# Altium PCB PCB1.PcbDoc
Units mm, origin at the board's own origin, x right, y up, seen from the top; angles counter-clockwise.
Board outline 80 x 50 mm, 2 copper layers (Top Layer, Bottom Layer); 88 components, 64 nets, 316 pads, 58 vias.
Unrouted connection lines stored in the file: 1.
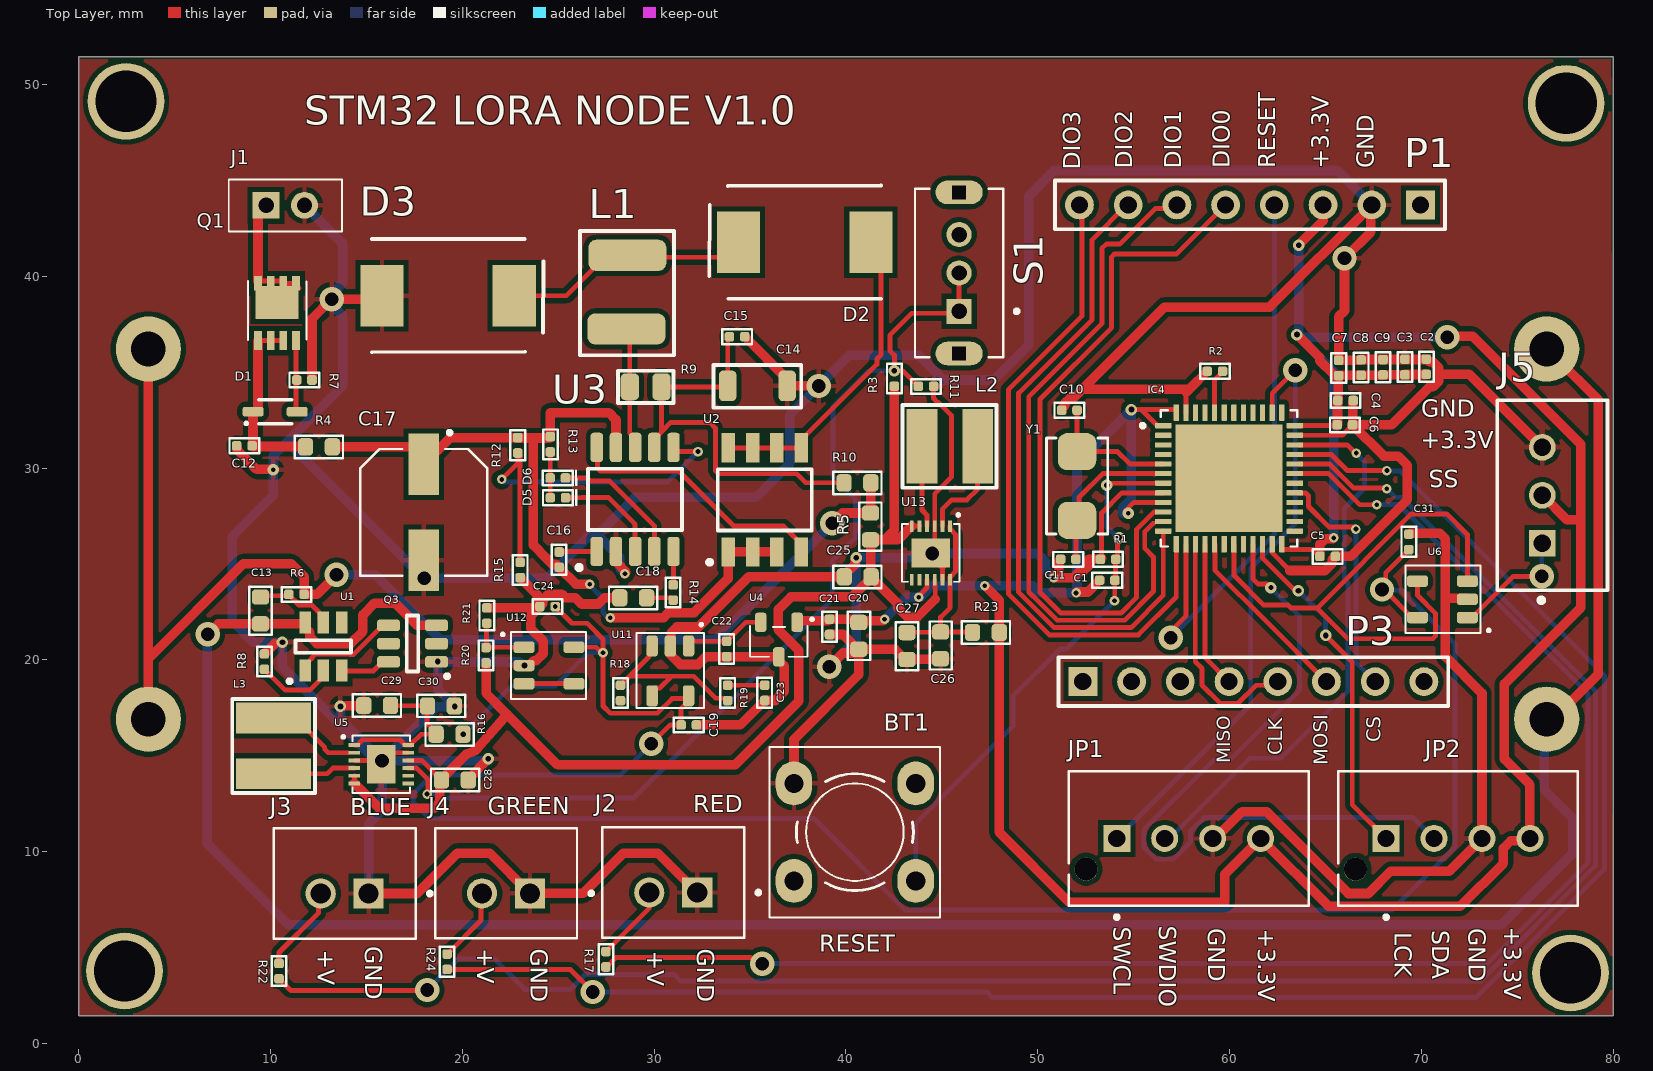
[diagram p0: Top Layer view]
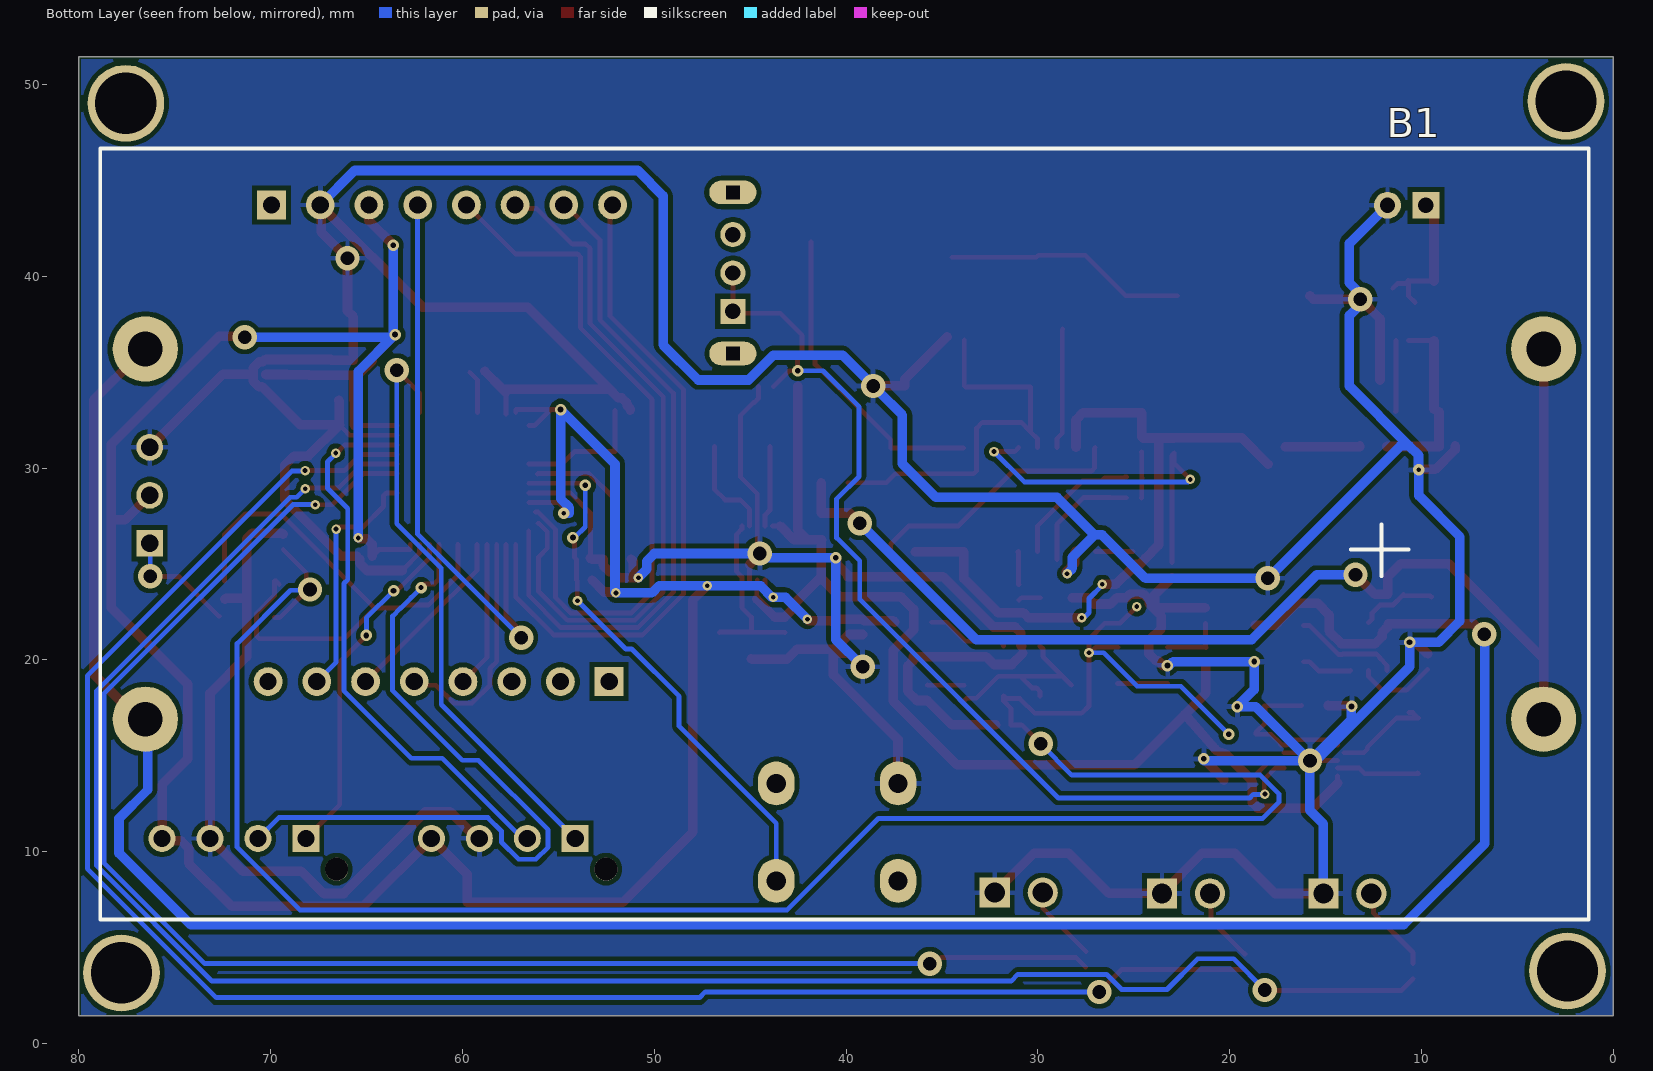
[diagram p1: Bottom Layer view, seen from below]
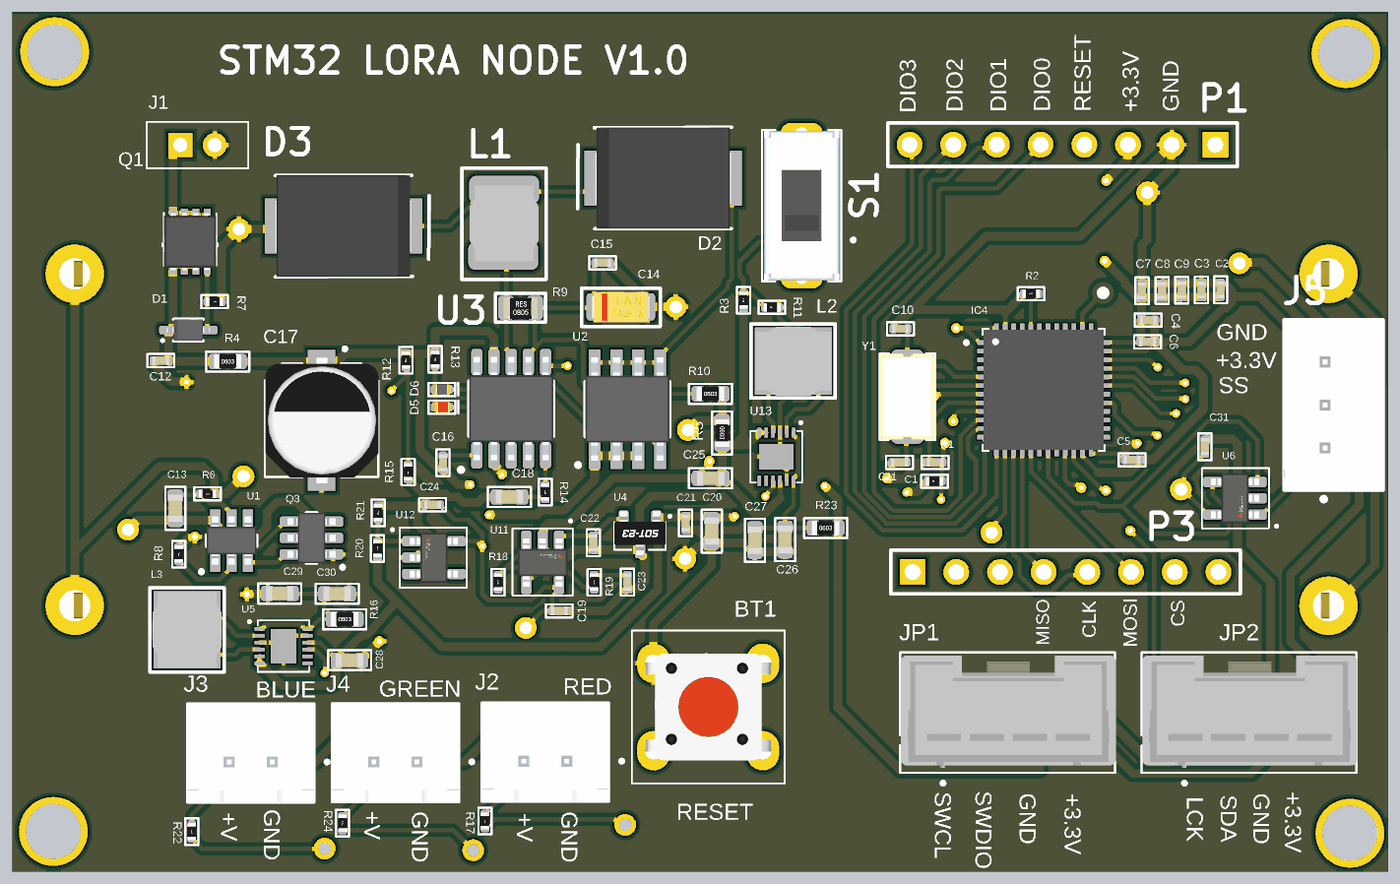
[diagram p2: 3D render of the assembled board from above, using the file's embedded part models]

## Layer stack, top to bottom
Top Solder: solder mask 0.0102, Solder Resist, Dk 3.5
Top Layer: signal copper 0.0356
Dielectric 1: dielectric 0.32, FR-4, Dk 4.8
Bottom Layer: signal copper 0.0356
Bottom Solder: solder mask 0.0102, Solder Resist, Dk 3.5

## Board outline
0,1.448 80,1.448 80,51.448 0,51.448

## Design rules (kind name [scope] priority, off if disabled: settings)
Clearance [All] p1: gap=0.254 ignorepadtopadclearanceinfootprint=FALSE except(0: Arc-Hole Track-Hole SMDPad-Hole THPad-Hole Via-Hole Fill-Hole Poly-Hole Region-Hole Text-Hole; 0.127: Arc-Arc Arc-Track Track-Track; 0.15: Arc-SMDPad Arc-Via Track-SMDPad Track-Via SMDPad-SMDPad SMDPad-Via)
HoleSize [All] p1: absolutevalues=TRUE maxlimit=4 minlimit=0.025 maxpercent=80.000 minpercent=20.000
MinimumSolderMaskSliver [All] p1: minsoldermaskwidth=0.01
PolygonConnect [All] p1: connectstyle=Relief reliefconductorwidth=0.254 reliefentries=4 polygonreliefangle="90 Angle" airgapwidth=0.254
RoutingVias [All] p1: holewidth=0.711 width=1.27 viastyle="Through Hole" minholewidth=0.711 minwidth=1.27 maxholewidth=0.711 maxwidth=1.27
SilkToSolderMaskClearance [IsPad] p1: minsilkscreentomaskgap=0.01 clearancetoexposedcopper=TRUE
SolderMaskExpansion [All] p1: expansion=0.102 istentingtop=FALSE
Width [All] p1: maxlimit=2 minlimit=0.254 preferedwidth=0.254 minimp=50.000000 maximp=50.000000 favimp=50.000000
27 further rules are at their usual default settings.

## Classes and differential pairs
component class POWER_NODE: B1 C12 C13 C14 C15 C16 C17 C18 C19 C20 C21 C22 C23 C24 C25 C26 C27 C28 C29 C30 C31 D1 D2 D3 D5 D6 J1 J5 J6 L1 L2 L3 Q1 Q3 R3 R4 R5 R6 R7 R8 R9 R10 R11 R12 R13 R14 R15 R16 R18 R19 R20 R21 R23 R54 S1 U1 U2 U3 U4 U5 U6 U11 U12 U13
component class "- MCU_NODE": BT1 C1 C2 C3 C4 C5 C6 C7 C8 C9 C10 C11 IC4 J2 J3 J4 JP1 JP2 P1 P3 R1 R2 R17 R22 R24 Y1

## Components (designator, comment, footprint, x,y, rotation, side; value= is the part's Value field where it differs from the comment)
B1 "18650 2cell" "18650 2CELL" 40.283,26.435 r0 bottom
BT1 "Nut Nhan 2 Chan SMD 3x6x2.5" "BUTTON 4P" 40.437,10.947 r0 top
C1 "0.1uF" "CAP 0402 (1005)" 53.664,25.248 r180 top
C2 "0.1uF" "CAP 0402 (1005)" 70.256,35.287 r90 top
C3 "0.1uF" "CAP 0402 (1005)" 69.139,35.274 r90 top
C4 "4.7uF" "CAP 0402 (1005)" 66.04,33.528 r0 top
C5 "0.1uF" "CAP 0402 (1005)" 65.107,25.4 r0 top
C6 "0.1uF" "CAP 0402 (1005)" 66.008,32.258 r0 top
C7 "0.1uF" "CAP 0402 (1005)" 65.684,35.223 r90 top
C8 "0.1uF" "CAP 0402 (1005)" 66.853,35.242 r90 top
C9 "0.1uF" "CAP 0402 (1005)" 67.996,35.261 r90 top
C10 "10pF" "CAP 0402 (1005)" 51.645,33.02 r0 top
C11 "10pF" "CAP 0402 (1005)" 51.587,25.248 r0 top
C12 "0.1uF" "CAP 0402 (1005)" 8.636,31.166 r180 top
C13 "10uF" "CAP 0603 (1608)" 9.474,22.581 r270 top
C14 "10uF" "CAP 1206 TANTALUM" 35.408,34.265 r0 top
C15 "4.7uF" "CAP 0402 (1005)" 34.322,36.855 r0 top
C16 "0.1uF" "CAP 0402 (1005)" 25.044,25.229 r270 top
C17 "47uF" "CAP ALUMIUM 47uF" 18.288,27.686 r270 top
C18 "10uF" "CAP 0603 (1608)" 28.905,23.241 r180 top
C19 "0.1uF" "CAP 0402 (1005)" 31.801,16.612 r0 top
C20 "10uF" "CAP 0603 (1608)" 40.665,21.26 r270 top
C21 "0.1uF" "CAP 0402 (1005)" 39.141,21.729 r270 top
C22 "1uF" "CAP 0402 (1005)" 33.782,20.574 r270 top
C23 "2.2uF" "CAP 0402 (1005)" 35.763,18.288 r270 top
C24 "0.1uF" "CAP 0402 (1005)" 24.441,22.784 r180 top
C25 "10uF" "CAP 0603 (1608)" 40.607,24.333 r180 top
C26 "10uF" "CAP 0603 (1608)" 44.933,20.763 r270 top
C27 "10uF" "CAP 0603 (1608)" 43.18,20.726 r270 top
C28 "10uF" "CAP 0603 (1608)" 19.609,13.741 r0 top
C29 "10uF" "CAP 0603 (1608)" 15.556,17.628 r180 top
C30 "10uF" "CAP 0603 (1608)" 18.883,17.602 r0 top
C31 "0.1uF" "CAP 0402 (1005)" 69.342,26.156 r90 top
D1 "10V" SOT-323 10.236,32.944 r0 top
D2 "SS34" DIOM8059X256N 37.846,41.783 r0 top
D3 "SS34" DIOM8059X256N 19.258,38.989 r180 top
D5 "RED" "LED 0402 RED" 25.019,28.448 r180 top
D6 "BLUE" "LED0402 BLUE" 25.013,29.48 r180 top
IC4 "STM32L082" QFN50P700X700X60-49N 59.969,29.464 r0 top
J1 "CONN" "HEADER 2P 2.54MM ANGLE RIGHT" 10.77,43.637 r0 top
J2 "B2B-XH-A(LF)(SN)" JST_B2B-XH-A(LF)(SN) 30.993,8.399 r0 top
J3 "B2B-XH-A(LF)(SN)" JST_B2B-XH-A(LF)(SN) 13.863,8.348 r0 top
J4 "B2B-XH-A(LF)(SN)" JST_B2B-XH-A(LF)(SN) 22.276,8.357 r0 top
J5 "B3B-XH-A(LF)(SN)" FP-B3B-XH-A_LF_SN-MFG 76.827,28.586 r90 top
JP1 "JP 1x4 2.54" "CONN 4P 2.5mm" 57.867,10.617 r180 top
JP2 "JP 1x4 2.54" "CONN 4P 2.5mm" 71.907,10.617 r180 top
L1 "10uH" "IND 10uH 4x4x2mm" 26.67,41.859 r270 top
L2 "2.2uH" "IND 4028" 45.413,31.039 r0 top
L3 "2.2uH" "IND 4028" 10.262,15.519 r90 top
P1 "Header 8" HDR1X8 69.951,43.722 r180 top
P3 "Header 8" HDR1X8 52.349,18.872 r0 top
Q1 "SIS413DN-T1-GE3" SIS862DNT1GE3 10.338,38.202 r90 top
Q3 "FS8205" SOT95P280X125-6N 17.399,20.853 r180 top
R1 "10kR" "RES 0402 (1005)" 53.619,24.155 r0 top
R2 "10kR" "RES 0402 (1005)" 59.233,35.052 r0 top
R3 "6.8kR" "RES 0402 (1005)" 42.52,34.677 r270 top
R4 "0R" "RES 0603 (1608)" 12.522,31.115 r0 top
R5 "0R" "RES 0603 (1608)" 41.275,26.96 r270 top
R6 "100R" "RES 0402 (1005)" 11.347,23.419 r180 top
R7 "100kR" "RES 0402 (1005)" 11.76,34.595 r180 top
R8 "2kR" "RES 0402 (1005)" 9.677,19.914 r270 top
R9 "50mR" "RES 0805 (2012)" 29.553,34.214 r0 top
R10 "0R" "RES 0603 (1608)" 40.596,29.239 r0 top
R11 "10kR" "RES 0402 (1005)" 44.171,34.265 r180 top
R12 "30kR" "RES 0402 (1005)" 22.885,31.191 r90 top
R13 "1kR" "RES 0402 (1005)" 24.587,31.242 r90 top
R14 "120R" "RES 0402 (1005)" 30.988,23.52 r90 top
R15 "10kR" "RES 0402 (1005)" 23.012,24.689 r90 top
R16 "0R" "RES 0603 (1608)" 19.329,16.129 r0 top
R17 "300R" "RES 0402 (1005)" 27.483,4.394 r90 top
R18 "0R" "RES 0402 (1005)" 28.245,18.282 r270 top
R19 "0.56R" "RES 0402 (1005)" 33.833,18.282 r270 top
R20 "10kR" "RES 0402 (1005)" 21.234,20.244 r270 top
R21 "10kR" "RES 0402 (1005)" 21.273,22.314 r270 top
R22 "180R" "RES 0402 (1005)" 10.439,3.778 r90 top
R23 "0R" "RES 0603 (1608)" 47.295,21.438 r0 top
R24 "180R" "RES 0402 (1005)" 19.202,4.267 r90 top
S1 "SW-SPST" SW_SS12D07VG4 45.898,40.176 r90 top
U1 "HY2112" SOT95P280X140-6N 12.751,20.701 r90 top
U2 "FDS4435BZ" SOIC127P600X175-8N 35.763,28.346 r90 top
U3 "CN3791" SOP100P600X175-10N 29.007,28.372 r90 top
U4 "ISL21010CFH330Z-TK" SOT-23-3 36.5,21.065 r180 top
U5 "ISL9110IRT7Z-T7A" "12-WFDFN EXPOSED PAD" 15.77,14.564 r0 top
U6 "LM321LVIDBVR" SOT-23-5 71.069,23.114 r180 top
U11 "LM321LVIDBVR" SOT-23-5 30.886,19.406 r270 top
U12 "LM321LVIDBVR" SOT-23-5 24.54,19.756 r0 top
U13 "ISL9110IRTNZ-T7A" "12-WFDFN EXPOSED PAD" 44.425,25.578 r270 top
Y1 "8Mhz" SMD5032 52.045,29.07 r90 top

## Footprints (in the part's own frame and the unit in brackets; to place one, negate y for a bottom-side part, rotate by r counter-clockwise, add the part's x,y. Pads: shape width x height; smd on the part's side, far side on the other; paste and mask are expansions set on the pad)
"12-WFDFN EXPOSED PAD" [mm]
  rect 0.6x0.2 smd: 1(-1.4,1) 2(-1.4,0.6) 3(-1.4,0.2) 4(-1.4,-0.2) 5(-1.4,-0.6) 6(-1.4,-1) 7(1.4,-1) 8(1.4,-0.6) 9(1.4,-0.2) 10(1.4,0.2) 11(1.4,0.6) 12(1.4,1)
  rect 1.5x2 smd: 13(0,0)
  silkscreen extent -2.03,-1.5 1.5,1.5, body extent -1.5,-1.5 1.5,1.5, height 0.75
"18650 2CELL" [mm]
  round 3.4 hole 1.8: 1(-36.653,9.523) 2(-36.653,-9.777) 3(36.247,9.523) 4(36.247,-9.777)
  silkscreen extent -39,-20.23 38.6,19.97, body extent -39.05,-20.23 38.65,19.97, height 21.55
"BUTTON 4P" [mil]
  oval 75x90 hole 39.37: 1(-124,103) 2(126,-97) 3(126,103) 4(-124,-97)
  silkscreen extent -174,-172 176,178, body extent -154,-119 157,125, height 78
"CAP 0402 (1005)" [mm]
  rrect50% 0.5x0.5 smd mask+0.05: 1(-0.4,0) 2(0.4,0)
  silkscreen extent -0.77,-0.39 0.78,0.38, body extent -0.5,-0.25 0.5,0.25, height 0.51
"CAP 0603 (1608)" [mm]
  rrect50% 0.8x0.9 smd mask+0.05: 1(-0.7,0) 2(0.7,0)
  silkscreen extent -1.24,-0.58 1.26,0.59, body extent -0.8,-0.4 0.8,0.4, height 0.81
"CAP 1206 TANTALUM" [mm]
  rrect50% 0.9x1.6 smd: 1(-1.575,0.025) 2(1.525,0.025)
  silkscreen extent -2.31,-1.12 2.26,1.12, body extent -1.73,-0.89 1.67,0.91, height 1.8
"CAP ALUMIUM 47uF" [mm]
  rect 3.2x1.6 smd: 1(-2.514,-0.302) 2(2.486,-0.302)
  silkscreen extent -4.26,-3.6 3.29,3, body extent -3.65,-3.58 3.65,3.02, height 7.7
"CONN 4P 2.5mm" [mm]
  rect 1.408x1.408 hole 0.9: 1(3.75,-0.076)
  round 1.408 hole 0.9: 2(1.25,-0.076) 3(-1.25,-0.076) 4(-3.75,-0.076)
  round 1.2 hole 1.2 unplated: ""(5.35,1.524)
  silkscreen extent -6.25,-3.58 6.25,4.12, body extent -6.3,-3.4 6.2,3.13, height 8.51
DIOM8059X256N [mm]
  rect 2.25x3.2 smd: 1(-3.45,0) 2(3.45,0)
  silkscreen extent -4.98,-2.95 3.98,2.95, body extent -3.98,-2.95 3.98,2.95, height 2.56
FP-B3B-XH-A_LF_SN-MFG [mm]
  rect 1.4x1.4 hole 0.9 paste-1000 mask+0: 1(-2.5,0.525)
  round 1.4 hole 0.9 paste-1000 mask+0: 2(0,0.525) 3(2.5,0.525)
  silkscreen extent -5.6,-2.88 4.95,2.88, body extent -5.05,-2.98 5.05,2.98, height 0.25
HDR1X8 [mm] "Connector; Header; 8 Position"
  rect 1.5x1.5 hole 0.9: 1(0,0)
  round 1.5 hole 0.9: 2(2.54,0) 3(5.08,0) 4(7.62,0) 5(10.16,0) 6(12.7,0) 7(15.24,0) 8(17.78,0)
  silkscreen extent -1.27,-1.27 19.05,1.27
"HEADER 2P 2.54MM ANGLE RIGHT" [mm]
  rect 1.4x1.4 hole 0.8: 1(-1,0.066)
  round 1.4 hole 0.8: 2(1,0.066)
  silkscreen extent -2.95,-1.3 2.95,1.42
"IND 10uH 4x4x2mm" [mil]
  rrect50% 64x160 smd: 1(30,76) 2(181,74)
  silkscreen extent -20,-21 235,172, body extent 20,-3 194,155, height 71
"IND 4028" [mm]
  rect 1.6x3.9 smd: 1(-1.45,0.102) 2(1.45,0.102)
  silkscreen extent -2.46,-2.06 2.44,2.26, body extent -2.19,-1.91 2.21,2.09, height 1.8
JST_B2B-XH-A(LF)(SN) [mm]
  rect 1.575x1.575 / inner round 1.575 / far side rect 1.575x1.575 hole 1.05: 1(1.25,-0.525)
  round 1.575 hole 1.05: 2(-1.25,-0.525)
  silkscreen extent -3.7,-2.88 4.54,2.88, body extent -3.7,-2.88 3.7,2.88, height 7
"LED0402 BLUE" [mm]
  rrect50% 0.5x0.5 smd mask+0.05: 1(0.438,-0.009) 2(-0.362,-0.009)
  silkscreen extent -0.92,-0.4 0.82,0.37, body extent -0.5,-0.3 0.5,0.3, height 0.2
"LED 0402 RED" [mm]
  rrect50% 0.5x0.5 smd mask+0.05: 1(0.438,-0.009) 2(-0.362,-0.009)
  silkscreen extent -0.92,-0.4 0.82,0.37, body extent -0.5,-0.3 0.5,0.3, height 0.2
QFN50P700X700X60-49N [mm]
  rrect25% 0.87x0.27 smd: 1(-3.43,2.75) 2(-3.43,2.25) 3(-3.43,1.75) 4(-3.43,1.25) 5(-3.43,0.75) 6(-3.43,0.25) 7(-3.43,-0.25) 8(-3.43,-0.75) 9(-3.43,-1.25) 10(-3.43,-1.75) 11(-3.43,-2.25) 12(-3.43,-2.75) 25(3.43,-2.75) 26(3.43,-2.25) 27(3.43,-1.75) 28(3.43,-1.25) 29(3.43,-0.75) 30(3.43,-0.25) 31(3.43,0.25) 32(3.43,0.75) 33(3.43,1.25) 34(3.43,1.75) 35(3.43,2.25) 36(3.43,2.75)
  rrect25% 0.27x0.87 smd: 13(-2.75,-3.43) 14(-2.25,-3.43) 15(-1.75,-3.43) 16(-1.25,-3.43) 17(-0.75,-3.43) 18(-0.25,-3.43) 19(0.25,-3.43) 20(0.75,-3.43) 21(1.25,-3.43) 22(1.75,-3.43) 23(2.25,-3.43) 24(2.75,-3.43) 37(2.75,3.43) 38(2.25,3.43) 39(1.75,3.43) 40(1.25,3.43) 41(0.75,3.43) 42(0.25,3.43) 43(-0.25,3.43) 44(-0.75,3.43) 45(-1.25,3.43) 46(-1.75,3.43) 47(-2.25,3.43) 48(-2.75,3.43)
  rect 5.6x5.6 smd paste-4 mask+0.102: 49(0,0)
  silkscreen extent -4.6,-3.55 3.55,3.55, body extent -3.5,-3.5 3.5,3.5, height 0.65
"RES 0402 (1005)" [mm]
  rrect50% 0.5x0.5 smd mask+0.05: 1(-0.4,0) 2(0.4,0)
  silkscreen extent -0.77,-0.38 0.77,0.38, body extent -0.5,-0.25 0.5,0.25, height 0.35
"RES 0603 (1608)" [mm]
  rrect50% 0.8x0.9 smd mask+0.05: 1(-0.7,0) 2(0.7,0)
  silkscreen extent -1.25,-0.59 1.25,0.58, body extent -0.8,-0.4 0.8,0.4, height 0.45
"RES 0805 (2012)" [mm]
  rrect50% 0.95x1.4 smd mask+0.05: 1(-0.825,0.025) 2(0.825,0.025)
  silkscreen extent -1.45,-0.81 1.45,0.86, body extent -1,-0.63 1,0.63, height 0.55
SIS862DNT1GE3 [mm]
  rect 0.99x0.405 smd: 1(-1.555,0.992) 2(-1.555,0.332) 3(-1.555,-0.328) 4(-1.555,-0.988)
  rect 0.51x0.405 smd: 5(1.555,-0.988) 6(1.555,-0.328) 7(1.555,0.332) 8(1.555,0.992)
  rect 1.725x2.235 smd: 8(0.438,0.002)
  rect 0.25x0.077 smd: 8(1.175,-1.156) 8(1.175,1.156)
  silkscreen extent -1.53,-1.53 1.56,1.53, body extent -1.78,-1.65 1.54,1.65, height 1.06
SMD5032 [mil]
  rrect50% 76x79 smd: 1(-70.5,0) 2(70.5,0)
  silkscreen extent -98,-63 98,63, body extent -98,-63 98,63, height 43
SOIC127P600X175-8N [mm]
  rect 1.525x0.7 smd: 1(-2.712,1.905) 2(-2.712,0.635) 3(-2.712,-0.635) 4(-2.712,-1.905) 5(2.712,-1.905) 6(2.712,-0.635) 7(2.712,0.635) 8(2.712,1.905)
  silkscreen extent -3.36,-2.45 1.6,2.97, body extent -3,-2.45 3,2.45, height 1.75
SOP100P600X175-10N [mm]
  rrect50% 1.525x0.65 smd: 1(-2.712,2) 2(-2.712,1) 3(-2.712,0) 4(-2.712,-1) 5(-2.712,-2) 6(2.712,-2) 7(2.712,-1) 8(2.712,0) 9(2.712,1) 10(2.712,2)
  silkscreen extent -3.67,-2.45 1.6,3.03, body extent -3,-2.45 3,2.45, height 1.75
SOT95P280X125-6N [mm]
  rrect50% 1.2x0.6 smd: 1(-1.25,0.95) 2(-1.25,0) 3(-1.25,-0.95) 4(1.25,-0.95) 5(1.25,0) 6(1.25,0.95)
  silkscreen extent -1.88,-1.46 0.3,1.78, body extent -1.4,-1.46 1.4,1.46, height 1.25
SOT95P280X140-6N [mm]
  rect 1.15x0.6 smd: 1(-1.25,0.95) 2(-1.25,0) 3(-1.25,-0.95) 4(1.25,-0.95) 5(1.25,0) 6(1.25,0.95)
  silkscreen extent -1.89,-1.45 0.33,1.84, body extent -1.4,-1.45 1.4,1.45, height 1.4
SOT-23-3 [mm]
  rrect50% 0.6x1 smd: 1(-0.95,-0.9) 2(0.95,-0.9) 3(0,0.9)
  silkscreen extent -1.77,-1.1 1.5,0.9, body extent -1.5,-1.33 1.5,1.22, height 1
SOT-23-5 [mm]
  rrect50% 1.1x0.6 smd: 1(-1.324,0.904) 2(-1.324,-0.046) 3(-1.324,-0.996) 4(1.276,-0.996) 5(1.276,0.904)
  silkscreen extent -2.48,-1.8 1.9,1.7, body extent -1.97,-1.82 1.93,1.73, height 0.25
SOT-323 [mm]
  rrect50% 1.1x0.5 smd: 1(-1.15,0) 2(1.15,0)
  silkscreen extent -1.54,-0.65 0.85,0.63, body extent -1.25,-0.63 1.25,0.63, height 1.15
SW_SS12D07VG4 [mm]
  rect 1.308x1.308 / inner round 1.308 / far side rect 1.308x1.308 hole 0.8: 1(-2,0)
  round 1.308 hole 0.8: 2(0,0) 3(2,0)
  oval 1.23x2.46 hole 0.7 square: S1(-4.2,0) S2(4.2,0)
  silkscreen extent -4.4,-3.1 4.4,2.3, body extent -4.35,-2.2 4.35,2.2, height 8.7

## Part data
B1: library part "18650 2CELL", "BATTERY HOLDER", Manufacturer=CXT, Manufacturer Part Number=T220213, Supplier=CXT, Unit Price=9.000VND
C1 C2 C3 C4 C5 C6 C7 C8 C9 C12 C16 C19 C21 C24 C31: library part "CAP0402 0.1uF 50V", "50V 100nF ±10% 0402 Multilayer Ceramic Capacitors MLCC - SMD/SMT ROHS", Manufacturer="Samwha Capacitor", Manufacturer Part Number=CS1005X7R104K500NR, Supplier="LCSC electronics", Unit Price=$0.0017
C10 C11: library part "CAP0402 10pF 50V", "50V 10pF CH ±2% 0402 Multilayer Ceramic Capacitors MLCC - SMD/SMT ROHS", Manufacturer="Murata Electronics", Manufacturer Part Number=GRM1552C1H100GA01D, Supplier="LCSC electronics", Unit Price=$0.0067
C13 C18 C20 C25 C26 C27 C28 C29 C30: library part "CAP0603 10uF 25V", "25V 10uF X5R ±20% 0603 Multilayer Ceramic Capacitors MLCC - SMD/SMT ROHS", Manufacturer=Chinocera, Manufacturer Part Number=HGC0603R5106M250NTHJ, Supplier="LCSC electronics", Unit Price=$0.0199
C14: library part "CAP1206 TANTALUM 10uF", "10uF 20V 150mΩ@100kHz ±20% 1206 Tantalum Capacitors ROHS", Manufacturer="Kyocera AVX", Manufacturer Part Number=TCJA106M020R0150, Supplier="LCSC electronics", Unit Price=$0.4964
C15: library part "CAP0402 4.7uF 25V", "25V 4.7uF X5R 0402 Multilayer Ceramic Capacitors MLCC - SMD/SMT ROHS", Manufacturer="Murata Electronics", Manufacturer Part Number=GRM155R61E475ME15D, Supplier="LCSC electronics", Unit Price=$0.0433
C17: library part "CAP ALUMI 47uF 16V", "47uF 16V 31mA@120Hz ±20% SMD,D5xL5.4mm Aluminum Electrolytic Capacitors - SMD ROHS", Manufacturer=KNSCHA, Manufacturer Part Number=RST47UF16V034, Supplier="LCSC electronics", Unit Price=$0.0250
C22: library part "CAP0402 1uF 25V", "25V 1uF ±10% 0402 Multilayer Ceramic Capacitors MLCC - SMD/SMT ROHS", Manufacturer="FH (Guangdong Fenghua Advanced Tech)", Manufacturer Part Number=0402X105K250NT, Supplier="LCSC electronics", Unit Price="US$ 0.0044"
C23: library part "CAP0402 2.2uF 25V", "25V 2.2uF ±20% 0402 Multilayer Ceramic Capacitors MLCC - SMD/SMT ROHS", Manufacturer=SANYEAR, Manufacturer Part Number=C0402X5R225M250NT, Supplier="LCSC electronics", Unit Price=$0.0166
D1: library part BAT60B, "Schottky Diode10V Single 600mV@1A 3A SOD-323 Schottky Barrier Diodes (SBD) ROHS", Manufacturer="High Diode", Manufacturer Part Number=BAT60B, Supplier="LCSC electronics", Unit Price=$0.0317
D2 D3: "40V Single 0.55V@3.0A 3A SMA Schottky Barrier Diodes (SBD) ROHS", Manufacturer=onsemi, Manufacturer Part Number=SS34, Supplier="LCSC electronics", Unit Price=$0.0242
D5: library part "LED RED 0402", "Red 0402 Light Emitting Diodes (LED) ROHS", Manufacturer="BrtLed(Bright LED Elec)", Manufacturer Part Number=BL-HUB37A-AV-TRB, Supplier="LCSD electronics", Unit Price=$0.0171
D6: library part "LED BLUE 0402", "blue 0402 Light Emitting Diodes (LED) ROHS", Manufacturer="BrtLed(Bright LED Elec)", Manufacturer Part Number=BL-HB337A-AV-TRB, Supplier="LCSD electronics", Unit Price=$0.0178
IC4: library part STM32F103C8T6, "IC MCU 32BIT 64KB FLASH 48LQFP", Manufacturer=STMicroelectronics, ComponentLink1Description=Datasheet, ComponentLink1URL=https://www.st.com/resource/en/datasheet/stm32f103cb.pdf, Detailed Description="ARM® Cortex®-M3 STM32F1 Microcontroller IC 32-Bit Single-Core 72MHz 64KB (64K x 8) FLASH", Manufacturer Part Number=STM32F103C8T6, Price=$6.35, Product status=Active, Supplier=https://www.digikey.com/en/products/detail/stmicroelectronics/STM32F103C8T6/1646338
J1: library part "CONN 2P 2.54mm THANG", "1x2P 1 XH/EH Tinning 2.54mm 2.54mm Female 2 -25℃~+85℃ Brass 3A Plug-in Plugin,P=2.5mm Wire To Board / Wire To Wire Connector ROHS", Manufacturer="SHOU HAN", Manufacturer Part Number="2.54mm-2P ZZ", Supplier="LCSD electronics", Unit Price=$0.0069
J2 J3 J4: "Connector Header Through Hole 2 position 0.098 (2.50mm)", Package=None, Check_prices=https://www.snapeda.com/parts/B2B-XH-A(LF)(SN)/JST/view-part/?ref=eda, MF="JST Sales", MP=B2B-XH-A(LF)(SN), SnapEDA_Link=https://www.snapeda.com/parts/B2B-XH-A(LF)(SN)/JST/view-part/?ref=snap
J5: library part CMP-17439-000014-3, "CONN HEADER VERT 3POS 2.5MM", Color=Natural, Contact Resistance=20mR, Current Rating=3A, Flammability Rating="UL94 V-0", Housing Color=White, Insulation Resistance=1GR, Max Operating Temperature=85°C, Max Voltage Rating (AC)=250V, Min Operating Temperature=-25°C, Connector Type=Header, Contact Finish - Mating=TIN, Contact Material=Brass, Contact Plating=Tin, Contact Shape=Square, Contact Type="Male Pin", Depth=5.75mm, Fastening Type=Detent, Gender=Male, Housing Material=Polyamide, Insulation Color=Natural, Insulation Material=Nylon, Lead Free="Lead Free", Lead Pitch=2.5mm, Length=9.9mm, Max Current Rating=3A, Max Voltage Rating (DC)=250V, Mount="Through Hole", Number of Contacts=3, Number of Positions=3, Number of Rows=1, Orientation=Straight, Packaging=Bulk, Pitch=2.5mm, REACH SVHC="No SVHC", Series=XH, Termination=Solder, Voltage Rating=250V, Voltage Rating (AC)=250V, Wire/Cable Gauge=22AWG
JP1 JP2: library part "JP 1x4 2.54 Duc Thang", "Cắm", Chung_Loai=Cắm, Don_Vi=Con, Ma_Hang=MH000903, Ten_Linh_Kien="Jump Đơn Đực 2.54MM 1x40P Thẳng 11MM"
L1: library part "IND 10uH", "10uH ±20% SMD,4x4x2mm Power Inductors ROHS", Manufacturer="SXN(Shun Xiang Nuo Elec)", Manufacturer Part Number=SMNR4020-10UH, Supplier="LCSC electronics", Unit Price=$0.0639
L2 L3: library part "IND 2.2uH", "2.2uH Magnetic inductor 20% 1.22A SMD,3x3mm Power Inductors ROHS", Manufacturer=APV, Manufacturer Part Number=ANR3012T2R2M, Supplier="LCSC electronics", Unit Price=$0.0390
P1 P3: "Header, 8-Pin", LatestRevisionDate=17-Jul-2002, LatestRevisionNote="Re-released for DXP Platform.", Publisher="Altium Limited"
Q1: "MOSFET (P-Channel)", Manufacturer=Vishay, Manufacturer Part Number=SIS413DN-T1-GE3, Supplier=Digikey, Unit Price=$0.57
Q3: library part "FET 2N FS8205", "20V 6A 28mΩ@4.5V,4A 1W 2 N-Channel SOT-23-6 MOSFETs ROHS", Manufacturer="Fortune Semicon", Manufacturer Part Number=FS8205, Supplier="LCSD electronics", Unit Price=$0.1805
R1 R2 R11: library part "RES0402 10kR 1%", "±1% 10kΩ 0402 Chip Resistor - Surface Mount ROHS", Manufacturer=VO, Manufacturer Part Number=SCR0402F10K, Supplier="LCSC electronics", Unit Price=$0.0005
R3: library part "RES0402 6.8kR 1%", "±1% 6.8kΩ 0402 Chip Resistor - Surface Mount ROHS", Manufacturer=VO, Manufacturer Part Number=SCR0402F6K8, Supplier="LCSC electronics", Unit Price=$0.0005
R4 R5 R10 R16 R23: library part "RES0603 0R", "0Ω 0603 Chip Resistor - Surface Mount ROHS", Manufacturer="KOA Speer Elec", Manufacturer Part Number=RK73Z1JTTD, Supplier="LCSC electronics", Unit Price=$0.0048
R6: library part "RES0402 100R 1%", "±1% 100Ω 0402 Chip Resistor - Surface Mount ROHS", Manufacturer=VO, Manufacturer Part Number=SCR0402F100R, Supplier="LCSC electronics", Unit Price=$0.0005
R7: library part "RES0402 100k 1%", "±1% 100kΩ 0402 Chip Resistor - Surface Mount ROHS", Manufacturer=VO, Manufacturer Part Number=SCR0402F100K, Supplier="LCSC electronics", Unit Price=$0.0005
R8: library part "RES0402 2kR 1%", "±1% 2kΩ 0402 Chip Resistor - Surface Mount ROHS", Manufacturer=VO, Manufacturer Part Number=SCR0402F2K, Supplier="LCSC electronics", Unit Price=$0.0005
R9: library part "RES0805 50mR Current Sense", "50mΩ ±1% 0805 Current Sense Resistors/Shunt Resistors ROHS", Manufacturer="TA-I Tech", Manufacturer Part Number=RL10FTNR050, Supplier="LCSC electronics", Unit Price=$0.0152
R12: library part "RES0402 47kR 1%", "±1% 47kΩ 0402 Chip Resistor - Surface Mount ROHS", Manufacturer=VO, Manufacturer Part Number=SCR0402F47K, Supplier="LCSC electronics", Unit Price=$0.0005
R13: library part "RES0402 1kR 1%", "±5% 1kΩ 0402 Chip Resistor - Surface Mount ROHS", Manufacturer=VO, Manufacturer Part Number=SCR0402J1K, Supplier="LCSC electronics", Unit Price=$0.0004
R14 R17 R22 R24: library part "RES0402 120R 1%", "±1% 120Ω 0402 Chip Resistor - Surface Mount ROHS", Manufacturer=VO, Manufacturer Part Number=SCR0402F120R, Supplier="LCSC electronics", Unit Price=$0.0005
R15: library part "RES0402 12kR 1%", "±1% 12kΩ 0402 Chip Resistor - Surface Mount ROHS", Manufacturer=VO, Manufacturer Part Number=SCR0402F12K, Supplier="LCSC electronics", Unit Price=$0.0005
R18: library part "RES0402 0R", "0Ω 0402 Chip Resistor - Surface Mount ROHS", Manufacturer="KOA Speer Elec", Manufacturer Part Number=RK73Z1ETTP, Supplier="LCSC electronics", Unit Price=$0.0072
R19: library part "RES0402 0.56R 5%", "±5% 560mΩ 0402 Chip Resistor - Surface Mount ROHS", Manufacturer=VO, Manufacturer Part Number=SCR0402JR560, Supplier="LCSC electronics", Unit Price=$0.0027
R20 R21: library part "RES0402 10kR 1%", "200mW Thick Film Resistors ±100ppm/℃ ±1% 10kΩ 0402 Chip Resistor - Surface Mount ROHS", Manufacturer="Vishay Intertech", Manufacturer Part Number=RCS040210K0FKED, Supplier="LCSC electronics", Unit Price=$0.0127
S1: "Single-Pole, Single-Throw Switch", LatestRevisionDate=17-Jul-2002, LatestRevisionNote="Re-released for DXP Platform.", PackageDescription="Switch; 2 Leads", PackageReference=SPST-2, Published=24-Mar-1999, Publisher="Altium Limited"
U1: "SOT-23-6 Battery Management ICs ROHS", Manufacturer="HYCON Tech", Manufacturer Part Number=HY2112, Supplier="LCSD electronics", Unit Price=$0.1053
U2: "SOT-23-6 Battery Management ICs ROHS", Manufacturer="HYCON Tech", Manufacturer Part Number=HY2112-BB, Supplier="LCSD electronics", Unit Price=$0.1053
U3: library part "IC CN3791", "SOP-10-1mm Battery Management ICs ROHS", Manufacturer="ShangHai Consonance Elec", Manufacturer Part Number=CN3791, Supplier="LCSD electronics", Unit Price=$0.5664
U4: library part "IC ISL21010CFH330Z-TK", "Series Voltage Reference IC Fixed 3V V ±0.2% 25 mA SOT-23-3", Manufacturer="Renesas Electronics America Inc", Manufacturer Part Number=ISL21010CFH330Z-TK, Supplier=Digikey, Unit Price=$2.9
U5: library part "IC ISL9110IRT7Z-T7A", "Buck-Boost Switching Regulator IC Positive Fixed 5V 1 Output 1.2A 12-WFDFN Exposed Pad", Manufacturer="Renesas Electronics America Inc", Manufacturer Part Number=ISL9110IRT7Z-T7A, Supplier=Digikey, Unit Price=$3.1
U6 U11 U12: library part "IC LM321LVIDBVR", "General Purpose Amplifier 1 Circuit SOT-23-5", Manufacturer="Texas Instruments", Manufacturer Part Number=LM321LVIDBVR, Supplier=Digikey, Unit Price=$0.26
U13: library part "IC ISL9110IRTNZ-T7A", "Buck-Boost Switching Regulator IC Positive Fixed 3.3V 1 Output 1.2A 12-WFDFN Exposed Pad", Manufacturer="Renesas Electronics America Inc", Manufacturer Part Number=ISL9110IRTNZ-T7A, Supplier=Digikey, Unit Price=$3.1
Y1: library part "CRYSTAL 8MHZ", "CRYSTAL 8MHZ SMD5032", Manufacture=Banlinhkien, Manufacture Part Number=LK_05093
BT1: Ma_Hang=MH001036, Ten="Nút Nhấn 2 Chân 3x6x2.5MM SMD"

## Free pads (board coordinates)
  round 4 hole 3.2: 2(2.388,3.785) 2(2.464,49.124) 2(77.546,49.022) 2(77.775,3.683)

## Via types
v1: diameter 0.5, hole 0.25, Top Layer to Bottom Layer, 20 vias
v2: diameter 1.27, hole 0.711, Top Layer to Bottom Layer, 19 vias
v3: diameter 0.6, hole 0.3, Top Layer to Bottom Layer, 16 vias
v4: diameter 0.6, hole 0.25, Top Layer to Bottom Layer, 3 vias

## Nets (pads, with @x,y where several pads share a name; then routed paths per layer and width w, separated by ;. In a path a pad name is that pad's centre, name@x,y a point inside that pad or via, vN(x,y) a via of type N, cw(c..) or ccw(c..) an arc to the next point about the centre after c; other vN are vias at no path point)
+BATT: B1.1 B1.2 R5.1 R6.1 R10.2 | length 66.3
  Top Layer w0.254: R5.1 R5.1@41.286,27.67 ; R10.2@41.286,29.228 R10.2
  Top Layer w0.5: B1.1 3.63,20.064 ; B1.2 3.63,20.064 ; v2(13.441,24.437) 12.423,23.419 R6.1 11.747,24.346 11.074,25.019 8.585,25.019 3.63,20.064 ; v2(39.289,27.131) 39.818,27.66 R5.1 ; R5.1@41.286,27.67 R10.2@41.286,29.228
  Bottom Layer w0.5: v2(13.441,24.437) 15.467,24.437 18.847,21.057 33.215,21.057 v2(39.289,27.131)
+VCC_3.3V: C2.1 C3.1 C4.1 C5.1 C6.1 C7.1 C8.1 C9.1 C20.1 C21.1 IC4.1 IC4.9 IC4.24 IC4.36 IC4.48 J5.2 JP1.4 JP2.4 P1.3 R1.1 R23.2 U4.1 U13.9 | length 166
  Top Layer w0.254: v1@43.756,23.3 44.225,23.768 U13.9 ; v4@54.574,27.783 55.005,28.214 IC4.9 ; v3(54.882,33.057) 55.396,33.057 ; IC4.1 56.239,32.214 55.396,33.057 ; IC4.48@57.211,33.057 55.396,33.057 ; IC4.48 IC4.48@57.219,33.049 ; IC4.24@62.719,25.768 IC4.24 ; IC4.24@62.727,25.76 64.347,25.76 C5.1 ; IC4.36@63.407,32.222 C6.1@65.608,32.222
  Top Layer w0.5: U4.1 37.531,22.047 39.06,22.047 C21.1 40.497,22.129 C20.1 ; C20.1@40.747,22.042 41.93,22.042 v1(42.012,22.123) ; v1(47.238,23.869) 47.995,23.113 R23.2 47.995,11.009 51.638,7.366 59.741,7.366 59.741,8.818 JP1.4 65.147,7.163 72.034,7.163 74.27,9.398 74.27,10.185 74.658,10.574 75.538,10.574 JP2.4 75.657,13.497 74.323,14.832 74.323,18.748 78.308,22.733 78.308,27.305 ; v1(51.994,23.495) 52.041,23.542 52.606,23.542 R1.1 ; v3(63.512,36.962) 64.694,35.781 64.694,35.611 65.43,34.874 ; v3(63.601,41.627) 64.871,42.897 P1.3 ; C5.1 64.707,26.031 64.994,26.318 65.383,26.318 v1(65.43,26.365) ; C6.1@65.616,32.222 65.608,32.222 C6.1 65.624,32.274 65.624,33.512 C4.1 65.662,33.55 65.662,34.801 C7.1 65.694,34.833 66.843,34.833 C8.1 66.862,34.852 67.986,34.852 C9.1 68.002,34.868 69.132,34.868 C3.1 69.145,34.881 C2.1@70.207,34.881 ; C2.1@70.207,34.887 C2.1@70.207,34.881 ; C2.1 70.25,34.881 C2.1@70.207,34.881 ; v2(71.342,36.823) 71.4,36.881 72.669,36.881 78.308,31.242 78.308,27.305 ; J5.2 77.582,27.305 78.308,27.305
  Bottom Layer w0.5: v1(42.012,22.123) 43.155,23.266 v1(43.79,23.266) 43.856,23.266 44.459,23.869 v1(47.238,23.869) 49.744,23.869 50.118,23.495 v1(51.994,23.495) 52.041,23.542 52.041,30.216 v3(54.882,33.057) 54.882,28.404 54.419,27.94 54.419,27.645 v4(54.713,27.645) ; v3(63.601,41.627) 63.601,37.051 v3(63.512,36.962) 65.43,35.044 v1(65.43,26.365) ; v3@63.745,36.823 v2(71.342,36.823)
+VCC_5V: C19.1 C24.1 C31.1 R16.2 U6.5 U11.5 U12.5 | length 118.6
  Top Layer w0.254: v1(24.845,22.784) 24.845,22.78 25.713,21.912 26.501,21.912 27.33,21.082 v1(27.33,20.371) ; U12.5 26.974,20.66 27.264,20.371 v1(27.33,20.371) ; v2(29.853,15.623) 30.841,16.612 C19.1 31.401,17.478 31.79,17.867 U11.5 31.646,17.986 30.933,17.986 30.168,17.221 27.708,17.221 27.33,17.599 v1(27.33,20.371) ; C31.1 68.139,24.553 68.139,23.867 v2(67.945,23.673) 68.068,23.673 69.531,22.21 U6.5
  Bottom Layer w0.254: v3(20.041,16.129) 22.539,18.628 24.825,18.628 26.572,20.375 27.326,20.375 v1(27.33,20.371) ; v2(29.853,15.623) 28.225,13.995 18.406,13.995 17.431,13.02 17.431,12.583 18.274,11.741 38.304,11.741 43.085,6.96 68.458,6.96 71.742,10.244 71.742,20.85 68.961,23.631 67.986,23.631 v2(67.945,23.673)
+VCC_EN: R3.1 R11.2 S1.1 S1.2 U5.9 | length 52.2
  Top Layer w0.254: U5.9 17.615,14.364 18.197,13.782 18.197,13.041 v1(18.162,13.006) ; R11.2 42.958,35.077 v3(42.52,35.077) 42.52,35.89 42.291,36.119 42.291,36.932 43.434,38.075 45.796,38.075 S1.1 S1.2
  Bottom Layer w0.254: v1(18.162,13.006) 18.174,12.994 18.763,12.994 18.955,12.802 28.931,12.802 39.286,23.157 39.286,25.164 40.488,26.365 40.488,28.397 39.319,29.566 39.319,33.198 41.199,35.077 v3(42.52,35.077)
+VREF3: C22.1 U4.2 U11.1 | length 4.3
  Top Layer w0.254: U11.1 31.79,20.803 31.962,20.974 C22.1 34.773,21.965 U4.2
+VREF_3.0V: R18.2
+VSYS: C25.1 C28.1 R3.2 R5.2 R20.2 U5.5 U5.6 U5.10 U13.5 U13.6 U13.10 | length 64.1
  Top Layer w0.254: U5.6 U5.5 ; U5.10 17.887,14.764 C28.1 ; U13.6 U13.5 ; U13.10 44.625,24.028 44.648,24.005 44.648,23.763 44.653,23.757 44.653,23.165
  Top Layer w0.5: U5.6 15.659,12.275 18.519,12.275 18.812,12.567 18.812,13.644 C28.1 18.909,13.791 20.222,15.105 20.657,15.257 20.75,15.35 20.761,15.362 22.334,17.163 ; R20.2 21.234,18.263 22.334,17.163 ; R5.2 41.291,26.244 41.291,24.349 C25.1 C25.1@41.307,24.323 ; R5.2@41.325,26.26 42.008,26.26 ; R3.2 42.52,26.772 42.008,26.26 ; U13.6 42.707,26.26 42.008,26.26 ; 44.653,23.165 43.715,22.226 43.208,22.226 42.713,22.721 42.713,22.918 C25.1@41.307,24.323 ; 22.334,17.163 24.968,14.529 34.214,14.529 37.541,17.856 37.541,20.499 36.474,21.566 36.474,22.631 37.135,23.292 40.316,23.292 41.307,24.283 C25.1@41.307,24.323
-BATT: B1.3 B1.4 C13.2 Q3.3 U1.6 | length 128.2
  Top Layer w0.5: v2(6.731,21.336) 7.276,21.881 C13.2 11.73,21.881 U1.6@11.73,21.746 ; U1.6@11.751,21.746 11.851,21.646 11.851,21.626 12.051,21.426 12.051,21.21 12.408,20.853 14.173,20.853 14.808,21.488 14.808,22.352 15.418,22.962 16.485,22.962 17.498,21.948 ; 17.628,21.803 Q3.3 ; B1.3@76.734,16.77 79.223,19.258 79.223,33.557 76.972,35.808 B1.4@76.734,35.808
  Bottom Layer w0.5: v2@6.706,21.311 6.706,10.414 10.922,6.198 74.168,6.198 77.902,9.931 77.902,11.735 76.404,13.232 B1.3@76.404,16.461
ADC_EC5: IC4.19 U6.3 U6.4 | length 29.9
  Top Layer w0.254: IC4.19 60.227,26.026 60.227,24.411 61.776,22.862 63.047,22.862 63.209,22.7 64.559,22.7 ; U6.4@69.545,23.939 69.716,24.11 U6.4 69.793,23.364 70.743,22.414 70.743,21.256 70.594,21.107 66.151,21.107 64.559,22.7 ; U6.3 72.393,26.54 71.318,27.615 69.474,27.615 64.559,22.7
ADC_VBAT: U12.3 U12.4 | length 2.6
  Top Layer w0.254: U12.3@23.238,18.765 U12.4@25.838,18.765
BLUE_LED: IC4.33 R24.1 | length 94.7
  Top Layer w0.254: R24.1@19.228,3.861 25.629,3.861 v2(26.797,2.692) ; IC4.33 65.303,30.714 66.146,29.87 v1(68.199,29.87)
  Bottom Layer w0.254: v2(26.797,2.692) 47.339,2.692 47.635,2.396 72.83,2.396 79.553,9.119 79.553,19.177 68.874,29.856 68.213,29.856 v1(68.199,29.87)
GND: BT1.1 C1.2 C2.2 C3.2 C4.2 C5.2 C6.2 C7.2 C8.2 C9.2 C10.1 C11.1 C12.2 C14.2 C15.2 C17.2 C18.2 C19.2 C20.2 C21.2 C22.2 C23.2 C24.2 C25.2 C26.2 C27.2 C28.2 C29.2 C30.2 C31.2 D3.2 IC4.8 IC4.23 IC4.35 IC4.47 J1.2 J2.1 J3.1 J4.1 J5.3 JP1.3 JP2.3 P1.2 Q3.1 R2.1 R7.1 R8.1 R11.1 R15.1 R21.1 U3.2 U4.3 U5.3 U5.11 U5.13 U6.2 U11.2 U12.2 U13.3 U13.11 U13.13 | length 394.3
  Top Layer w0.254: U5.3 U5.13@15.57,14.764 ; U5.13@16.078,15.113 16.129,15.164 U5.11 ; R11.1 44.571,33.634 44.785,33.419 44.826,33.419 45.491,32.754 45.491,29.527 44.625,28.66 U13.3 U13.13@44.625,25.778 ; U13.11 U13.13@45.025,24.978 ; C1.2@53.325,25.309 53.325,27.662 54.376,28.714 IC4.8 ; IC4.47@57.735,32.82 57.735,33.955 ; IC4.23@62.227,26.026 62.227,25.58 63.144,24.663 ; IC4.35 65.883,31.714 66.135,31.966 66.135,31.985 C6.2
  Top Layer w0.5: C12.2 8.236,30.973 9.269,29.94 10.115,29.94 v4(10.135,29.921) ; R8.1 10.227,20.863 ; R7.1 12.16,37.789 v2(13.183,38.811) 15.63,38.811 D3.2 ; v3(13.64,17.577) 13.665,17.602 14.831,17.602 C29.2 ; J3.1 17.628,7.823 19.736,9.931 21.426,9.931 J4.1 26.297,7.832 28.397,9.931 30.186,9.931 J2.1 ; Q3.1 18.659,19.914 v3(18.72,19.914) ; C28.2 20.309,13.803 21.347,14.841 v3(21.347,14.853) ; R21.1 23.918,22.714 23.918,22.784 C24.2 ; R15.1 23.918,23.383 23.918,22.907 C24.2 ; v3(23.241,19.71) 23.466,19.71 23.716,19.96 23.843,19.96 24.221,20.338 24.221,20.983 23.559,21.645 23.559,22.302 C24.2 ; U3.2 28.082,25.585 28.082,25.054 28.282,24.854 28.282,24.827 28.52,24.589 28.52,24.542 v1(28.473,24.495) ; C18.2 27.396,23.241 27.071,22.916 26.213,22.916 25.888,23.241 25.376,23.241 25.184,23.434 24.499,23.434 24.191,23.126 24.191,22.934 C24.2 ; U11.2@30.785,20.345 31.369,19.761 32.284,19.761 32.697,20.174 C22.2 33.786,20.17 36.496,20.17 U4.3 36.5,19.965 36.779,19.686 36.779,18.364 36.303,17.888 C23.2 34.487,16.612 C19.2 ; U11.2 30.89,20.78 30.89,21.424 31.183,21.717 32.309,21.717 34.925,24.333 C25.2 39.907,24.423 40.472,24.987 40.472,25.258 v3(40.538,25.324) ; C15.2 36.932,34.645 C14.2 38.568,34.29 v2(38.576,34.282) ; BT1.1 37.287,15.854 40.665,19.233 C20.2 ; v2(39.123,19.646) 39.842,20.365 40.42,20.365 C20.2@40.615,20.56 ; C21.2 39.847,21.329 C20.2@40.615,20.56 ; U13.13@44.471,25.531 U13.13@45.025,24.978 ; C26.2 44.914,20.045 43.198,20.045 C27.2 43.09,20.026 42.557,20.56 C20.2 ; C11.1 51.093,25.153 51.093,24.617 50.825,24.349 v1(50.825,24.282) 51.841,24.282 52.156,24.598 52.33,24.598 52.663,24.931 52.663,25.248 C1.2 C1.2@53.325,25.309 ; C10.1 51.245,33.093 51.395,33.243 51.395,33.362 51.702,33.67 51.882,33.67 52.332,34.12 ; 57.735,33.955 57.901,34.12 ; R2.1 57.901,34.12 ; JP1.3 59.236,10.813 59.378,10.813 60.655,12.09 61.928,12.09 62.825,11.194 62.825,11.186 66.188,7.823 67.234,7.823 68.402,8.992 71.456,8.992 JP2.3 73.157,18.262 71.247,20.172 71.247,23.245 ; 63.144,24.663 64.962,24.663 65.357,25.058 65.357,25.25 C5.2 66.314,25.4 69.26,28.346 69.26,30.155 68.792,30.623 68.043,30.623 C6.2 ; C4.2 66.424,33.512 66.424,32.274 C6.2 ; P1.2 P1.2@67.361,43.672 ; C31.2 69.397,26.61 70.954,26.61 71.247,26.318 71.247,23.245 ; C2.2@70.234,35.665 66.875,35.665 C8.2 66.843,35.633 65.694,35.633 C7.2 65.684,37.897 65.989,38.202 v2(65.989,40.945) 67.361,42.316 P1.2@67.361,43.672 ; C2.2 70.406,35.537 70.599,35.537 70.906,35.229 70.906,34.887 ; U6.2 72.343,23.21 71.282,23.21 71.247,23.245 ; J5.3 72.5,34.887 70.906,34.887 ; C20.2@40.615,20.56 C20.2 ; 52.332,34.12 57.901,34.12 ; 52.332,34.12 52.326,34.12 56.604,38.398 62.086,38.398 P1.2@67.361,43.672 ; C6.2 68.446,32.258 70.425,34.237 70.599,34.237 70.906,34.545 70.906,34.887
  Bottom Layer w0.5: J1.2 13.753,41.72 13.753,39.657 13.183,39.086 v2(13.183,38.811) 13.183,38.536 13.753,37.965 13.753,34.277 10.643,31.166 ; v3(13.64,17.577) 13.654,17.562 13.654,16.896 v2(15.812,14.738) ; J3.1 15.113,11.455 15.812,12.155 v2(15.812,14.738) ; v2@15.321,14.932 10.617,19.636 v3(10.617,20.93) 9.093,20.93 8.001,22.022 8.001,26.433 10.135,28.566 v4(10.135,29.921) 10.154,29.94 10.154,30.677 10.643,31.166 ; v3@21.337,14.738 v2(15.812,14.738) ; v3@21.337,14.853 v3(21.347,14.853) ; v3(23.241,19.71) 23.147,19.71 22.944,19.914 v3(18.72,19.914) 18.72,18.454 v3(19.605,17.569) 18.644,17.569 v2(15.812,14.738) ; v1(28.473,24.495) 28.197,24.771 28.197,25.357 27.037,26.518 ; v2@38.329,34.265 38.329,34.034 37.062,32.767 37.062,30.225 35.31,28.473 28.992,28.473 27.037,26.518 ; v2(38.576,34.282) 40.185,35.89 43.786,35.89 45.082,34.595 47.701,34.595 49.53,36.424 49.53,44.196 50.851,45.517 65.616,45.517 P1.2 ; v2(39.123,19.646) 40.538,21.061 v3(40.538,25.324) 44.263,25.324 v2(44.492,25.552) 49.988,25.552 50.383,25.157 50.383,24.732 50.825,24.29 v1(50.825,24.282) ; 10.643,31.166 11.096,31.166 v2(18.008,24.254) 24.381,24.254 26.645,26.518 27.037,26.518
GREEN_LED: IC4.32 R22.1 | length 102.9
  Top Layer w0.254: R22.1 11.049,2.769 18.136,2.769 v2(18.161,2.794) ; IC4.32 65.21,30.214 66.468,28.956 68.17,28.956 v1(68.195,28.93)
  Bottom Layer w0.254: v2(18.161,2.794) 19.787,4.42 21.666,4.42 23.266,2.819 25.634,2.819 26.419,3.604 31.041,3.604 31.392,3.254 73.053,3.254 79.069,9.27 79.069,18.396 68.981,28.484 68.642,28.484 v1(68.195,28.93)
I2C_CLK_SHT: IC4.22 JP2.1 | length 18.1
  Top Layer w0.254: IC4.22 61.719,25.301 63.343,23.678 63.521,23.678 v3(63.587,23.612) ; v3(65.008,21.277) 66.391,19.894 66.391,12.46 JP2.1
  Bottom Layer w0.254: v3(63.587,23.612) 65.008,22.191 v3(65.008,21.277)
I2C_SDA_SHT: IC4.21 JP2.2 | length 38
  Top Layer w0.254: IC4.21 61.214,26.029 61.214,24.232 61.477,23.969 61.959,23.969 v4(62.154,23.774)
  Bottom Layer w0.254: v4(62.154,23.774) 62.675,23.253 62.675,23.234 63.209,22.7 63.229,22.7 63.64,22.288 63.64,18.404 60.01,14.773 59.162,14.773 55.532,11.143 55.532,10.244 56.167,9.608 57.066,9.608 57.963,10.505 57.963,11.074 58.667,11.778 69.572,11.778 JP2.2
"LORA CLK": IC4.15 P3.5 | length 12.3
  Top Layer w0.254: IC4.15@58.211,26.034 58.211,19.912 58.56,19.563 58.56,18.682 59.501,17.741 60.438,17.741 61.378,18.682 62.319,18.682 P3.5
"LORA CS": IC4.29 P3.7 | length 12.7
  Top Layer w0.254: IC4.29 63.955,28.714 64.111,28.557 64.111,28.002 65.189,26.924 66.581,26.924 v1(66.581,26.821)
  Bottom Layer w0.254: v1(66.581,26.821) 66.581,19.88 P3.7
"LORA DIO0": IC4.10 P1.5 | length 36.9
  Top Layer w0.254: IC4.10@56.181,27.706 56.051,27.706 55.149,26.804 55.149,23.259 54.34,22.45 51.2,22.45 50.114,23.536 50.114,33.59 53.848,37.324 53.848,41.025 53.997,41.173 57.242,41.173 P1.5
"LORA DIO1": IC4.11 P1.6 | length 36
  Top Layer w0.254: 56.058,27.126 56.009,27.126 55.575,26.692 55.575,25.819 56.031,25.362 56.031,23.574 54.527,22.069 51.005,22.069 50.069,23.006 49.53,23.544 49.53,33.724 53.34,37.534 53.34,41.456 53.565,41.681 54.27,41.681 56.12,43.532 57.06,43.532 P1.6
"LORA DIO2": IC4.12 P1.7 | length 34.9
  Top Layer w0.254: P1.7 54.644,43.722 52.832,41.91 52.832,37.744 48.997,33.909 48.997,23.539 49.911,22.625 50.847,21.688 54.865,21.688 56.539,23.363 IC4.12
"LORA DIO3": IC4.13 P1.8 | length 35.1
  Top Layer w0.254: P1.8 52.299,43.594 52.299,37.929 48.463,34.094 48.463,23.448 50.604,21.307 55.246,21.307 57.219,23.281 IC4.13
"LORA MISO": IC4.16 P3.4 | length 7.7
  Top Layer w0.254: IC4.16 58.719,20.122 P3.4
"LORA MOSI": IC4.17 P3.6 | length 9.6
  Top Layer w0.254: IC4.17@59.233,26.034 59.233,24.687 61.937,21.983 61.938,21.983 P3.6
"LORA RESET": IC4.14 P1.4 | length 30
  Top Layer w0.254: v2(56.937,21.161) 56.937,21.504 57.719,22.286 IC4.14
  Bottom Layer w0.254: v2(56.937,21.161) 62.331,26.555 P1.4
NetBT1_2: BT1.2 C1.1 IC4.7 R1.2 | length 28.5
  Top Layer w0.254: v3(53.596,29.107) 53.689,29.107 53.796,29.214 IC4.7 ; v1(54,23.089) 54.01,23.098 54.01,24.146 R1.2 54.042,24.178 54.042,25.225 C1.1 54.15,25.334 54.15,26.296 v3(54.237,26.382)
  Bottom Layer w0.254: BT1.2 43.637,11.487 48.703,16.553 48.703,18.103 51.172,20.572 51.484,20.572 v1(54,23.089) ; v3(53.596,29.107) 53.596,26.932 54.137,26.391 54.184,26.391 54.192,26.382 v3(54.237,26.382)
NetC12_1: C12.1 D1.1 Q1.1 Q1.2 Q1.3 R4.1 | length 9.8
  Top Layer w0.254: C12.1@9.072,31.13 C12.1 C12.1@9.086,31.216 ; D1.1 9.223,32.944 D1.1@9.346,33.067 ; Q1.1 Q1.2 Q1.3 ; R4.1@11.807,31.13 R4.1
  Top Layer w0.5: C12.1@9.072,31.13 R4.1@11.807,31.13 ; C12.1@9.086,31.216 D1.1 ; D1.1@9.346,33.067 Q1.1
NetC13_1: C13.1 R6.2 U1.5 | length 4.1
  Top Layer w0.254: C13.1 9.543,23.35 10.878,23.35 R6.2@10.938,23.41 ; R6.2 R6.2@10.938,23.41 ; U1.5 12.578,22.124 12.578,22.441 12.154,22.865 11.483,22.865 R6.2@10.938,23.41
NetC14_1: C14.1 C15.1 R9.2 R10.1 U3.7 | length 21.5
  Top Layer w0.254: U3.7 30.007,31.521 30.388,31.903 30.87,32.385 32.897,32.385 33.194,32.088 33.194,29.856 33.343,29.707 37.425,29.707 37.894,29.239 R10.1 ; 30.378,31.912 R9.2 33.781,34.239 C14.1 C15.1@33.832,36.685
NetC16_1: C16.1 U3.1 | length 2
  Top Layer w0.254: C16.1@25.044,25.66 U3.1 U3.1@27.003,25.656
NetC18_1: C18.1 R14.1 | length 1.2
  Top Layer w0.254: C18.1@29.857,23.243 30.865,23.243 R14.1
NetC23_1: C23.1 R19.1 | length 1.9
  Top Layer w0.254: R19.1 33.836,18.685 35.76,18.685 C23.1
NetC26_1: C26.1 C27.1 R23.1 U13.1 U13.12 | length 9.4
  Top Layer w0.254: C27.1 43.198,21.445 44.914,21.445 C26.1 ; U13.1 45.425,26.832 45.702,26.555 45.702,24.601 45.425,24.324 U13.12 45.425,22.726 44.933,22.234 C26.1 ; R23.1 46.582,21.45 44.945,21.45 C26.1
NetC29_1: C29.1 C30.1 R16.1 U5.1 U5.12 | length 8.4
  Top Layer w0.254: U5.1 14.516,15.564 14.793,15.841 16.747,15.841 17.024,15.564 U5.12 17.316,15.564 17.343,15.591 17.343,15.624 17.848,16.129 R16.1 18.629,16.219 18.147,16.701 C30.1@18.147,17.602 ; C29.1 16.269,17.615 18.171,17.615 C30.1
NetD1_2: D1.2 Q1.4 R7.2 | length 3.7
  Top Layer w0.254: Q1.4 11.326,32.972 D1.2@11.354,32.944
NetD2_1: D2.1 D3.1 L1.1 | length 12.7
  Top Layer w0.254: D3.1 25.425,38.989 27.534,41.097 28.753,41.097 29.972,41.097 30.074,40.996 D2.1@34.472,40.996
NetD2_2: D2.2 U2.5 U2.6 U2.7 U2.8 | length 16.3
  Top Layer w0.254: U2.8 U2.7 U2.6 U2.5 37.668,31.471 41.608,35.41 41.608,35.69 41.829,35.912 D2.2@41.829,41.783
NetD5_1: D5.1 D6.1 R13.1 | length 2.4
  Top Layer w0.254: D5.1@24.587,28.448 24.578,28.457 24.578,29.486 D6.1 24.581,29.496 24.581,30.836 R13.1
NetD5_2: D5.2 U3.3 | length 6.1
  Top Layer w0.254: D5.2 26.223,28.473 27.61,28.473 29.007,27.076 U3.3 U3.3@29.007,25.222
NetD6_2: D6.2 U3.4 | length 7
  Top Layer w0.254: D6.2@25.375,29.54 25.447,29.54 25.498,29.489 26.503,29.489 26.655,29.337 27.661,29.337 30.007,26.991 U3.4
NetIC4_44: IC4.44 R2.2 | length 2.3
  Top Layer w0.254: IC4.44 59.219,34.607 R2.2@59.614,35.001
NetJ1_1: J1.1 Q1.5 Q1.6 Q1.7 Q1.8 | length 7.7
  Top Layer w0.254: Q1.8@9.346,39.757 Q1.7 Q1.6 10.674,39.757 10.693,39.776 10.693,39.677 10.741,39.629 11.242,39.629 Q1.8@11.494,39.377 ; J1.1@9.346,43.28 J1.1 ; Q1.8@10.336,38.64 10.666,38.97 Q1.6@10.666,39.749
  Top Layer w0.5: Q1.8@9.346,39.757 J1.1@9.346,43.28
NetJ2_2: J2.2 R17.2 | length 4
  Top Layer w0.254: R17.2 29.737,7.049 29.737,7.868 J2.2
NetJ3_2: J3.2 R22.2 | length 4.5
  Top Layer w0.254: R22.2 10.439,4.75 12.493,6.803 12.493,7.703 J3.2
NetJ4_2: J4.2 R24.2 | length 3.9
  Top Layer w0.254: R24.2 20.971,6.436 20.971,7.777 J4.2
NetJ5_1: J5.1 U6.1 | length 6.2
  Top Layer w0.254: U6.1@72.669,22.276 72.709,22.276 74.792,24.359 v2(76.276,24.359)
  Bottom Layer w0.254: v2(76.276,24.359) 76.276,26.06 J5.1
NetL1_2: L1.2 R9.1 U3.8 | length 6.3
  Top Layer w0.254: L1.2@28.702,37.262 28.728,37.235 R9.1 28.728,31.819 29.007,31.541 U3.8
NetL2_1: L2.1 U13.4 | length 4.3
  Top Layer w0.254: L2.1 43.963,27.816 44.225,27.555 U13.4
NetL2_2: L2.2 U13.2 | length 5.4
  Top Layer w0.254: U13.2 45.025,27.854 45.517,28.346 46.304,28.346 46.863,28.905 L2.2
NetL3_1: L3.1 U5.4 | length 4.4
  Top Layer w0.254: L3.1@10.206,14.116 L3.1 12.955,14.069 13.249,14.364 U5.4
NetL3_2: L3.2 U5.2 | length 5.3
  Top Layer w0.254: L3.2@10.656,17.255 10.445,17.255 L3.2 11.31,16.969 12.827,15.452 12.827,15.338 13.001,15.164 14.046,15.164
NetQ3_4: Q3.4 U1.1 | length 5.5
  Top Layer w0.254: U1.1 11.801,19.726 12.156,20.082 12.156,20.123 12.336,20.303 14.116,20.303 14.127,20.292 14.337,20.292 15.849,21.803 Q3.4
NetQ3_6: Q3.6 U1.3 | length 2.7
  Top Layer w0.254: U1.3 13.728,19.424 15.357,19.424 15.837,19.903 Q3.6
NetR8_2: R8.2 U1.2 | length 4.1
  Top Layer w0.254: R8.2 10.764,18.427 12.051,18.427 12.754,19.131 12.754,19.448 U1.2
NetR12_1: R12.1 R15.2 U3.6 | length 19.8
  Top Layer w0.254: v1(22.047,29.413) 22.885,30.251 R12.1@22.885,30.759 ; R12.1 23.012,30.664 R15.2 ; U3.6 31.007,31.06 31.202,30.865 v1(32.282,30.865)
  Bottom Layer w0.254: v1(22.047,29.413) 22.174,29.286 30.703,29.286 v1(32.282,30.865)
NetR14_2: R14.2 U3.5 | length 1.8
  Top Layer w0.254: R14.2 30.997,23.93 30.997,25.65 U3.5 U3.5@31.036,25.631
NetR18_1: R18.1 R19.2 U11.3 U11.4 | length 10
  Top Layer w0.254: R18.1 28.715,19.152 ; U11.4 29.89,18.367 30.062,18.538 30.299,18.538 30.912,19.152 ; U11.3 29.732,20.571 29.732,20.168 28.715,19.152 ; R19.2 33.71,18.005 33.202,18.005 32.055,19.152 30.912,19.152 ; 28.715,19.152 30.912,19.152
NetR20_1: R20.1 R21.2 U12.1 | length 3.3
  Top Layer w0.254: R20.1 R20.1@21.253,20.663 ; R21.2 21.253,21.895 R20.1@21.253,20.663 ; U12.1@23.238,20.665 21.256,20.665 R20.1@21.253,20.663
NetU2_4: U2.4 U3.10 | length 13.8
  Top Layer w0.254: U3.10 27.051,31.04 27.051,29.994 27.2,29.845 31.293,29.845 34.163,26.975 36.74,26.975 37.668,26.047 U2.4
OSC_IN: C10.2 IC4.5 Y1.2 | length 6.9
  Top Layer w0.254: C10.2 Y1.2 54.153,30.861 54.792,30.222 56.531,30.222 IC4.5
OSC_OUT: C11.2 IC4.6 Y1.1 | length 7.6
  Top Layer w0.254: C11.2 Y1.1@51.987,27.184 ; Y1.1 52.15,27.385 52.15,28.477 53.387,29.714 56.062,29.714 56.083,29.693
RED_LED: IC4.31 R17.1 | length 82.6
  Top Layer w0.254: R17.1@27.508,3.988 28.016,4.496 35.031,4.496 35.361,4.166 v2(35.636,4.166) ; IC4.31 65.171,29.714 66.793,28.092 v1(67.666,28.092)
  Bottom Layer w0.254: v2(35.636,4.166) 73.426,4.166 78.688,9.428 78.688,18.238 68.823,28.103 67.677,28.103 v1(67.666,28.092)
SWCLK: IC4.38 JP1.1 | length 31
  Top Layer w0.254: IC4.38 62.219,33.898 v2(63.424,35.103)
  Bottom Layer w0.254: JP1.1 61.1,17.677 61.1,24.785 63.424,27.109 v2(63.424,35.103)
SWDIO: IC4.34 JP1.2 | length 29.2
  Top Layer w0.254: IC4.34 66.136,31.214 66.565,30.785 v1(66.599,30.785)
  Bottom Layer w0.254: JP1.2 56.874,10.693 57.455,11.274 57.455,11.284 61.049,14.878 62.655,14.878 66.18,18.404 66.18,23.984 65.975,24.189 65.975,27.898 67.031,28.954 67.031,30.324 66.599,30.756 v1(66.599,30.785)
VCC_IN: C16.2 C17.1 R4.2 R12.2 R13.2 U2.1 U2.2 U2.3 U3.9 | length 39.7
  Top Layer w0.5: R4.2@13.222,31.165 R4.2 17.085,31.115 ; C17.1 19.378,31.591 R12.2 22.904,31.572 23.698,31.572 ; v1(26.642,23.951) 25.922,23.951 C16.2 24.894,24.979 24.702,24.979 24.394,25.286 24.394,25.288 23.698,25.984 23.698,31.572 ; v1@27.709,22.2 30.486,22.2 30.757,22.47 32.085,22.47 33.858,24.244 U2.1 U2.2 U2.3 ; U3.9 28.007,32.521 27.635,32.893 24.587,32.893 R13.2 24.517,31.572 23.698,31.572
  Bottom Layer w0.254: v1(26.642,23.951) 26.642,23.891 27.33,23.202 27.33,22.468 v1@27.531,22.267
  other v1: 27.709,22.198
pads on no net: BT1.3 BT1.4 IC4.2 IC4.3 IC4.4 IC4.18 IC4.20 IC4.25 IC4.26 IC4.27 IC4.28 IC4.30 IC4.37 IC4.39 IC4.40 IC4.41 IC4.42 IC4.43 IC4.45 IC4.46 IC4.49 JP1. JP2. P1.1 P3.1 P3.2 P3.3 P3.8 Q3.2 Q3.5 S1.3 S1.S1 S1.S2 U1.4 U5.7 U5.8 U13.7 U13.8

## Polygon pours and split planes (outlines as drawn)
GND on Bottom Layer "GND_L02_P002" (solid, pour order 2): 0,51.333 0.025,51.308 79.883,51.308 79.883,1.448 0,1.448
GND on Top Layer "	" (solid, pour order 1): 79.883,51.308 0,51.308 0,1.448 79.985,1.448 79.985,1.473

## Silkscreen, mask and mechanical layers (free items; w line width, h text height)
Top Overlay:
  text "STM32 LORA NODE V1.0" at 11.76,47.905 h1.52
  text "DIO0" at 60.325,45.644 h1.52 r90
  text "RESET" at 62.687,45.644 h1.52 r90
  text "GND" at 67.818,45.644 h1.52 r90
  text "DIO2" at 55.245,45.618 h1.52 r90
  text "DIO1" at 57.785,45.618 h1.52 r90
  text "+3.3V" at 65.481,45.618 h1.52 r90
  text "DIO3" at 52.527,45.568 h1.52 r90
  text "GND" at 70.002,32.36 h1.52
  text "+3.3V" at 69.977,30.734 h1.52
  text "SS" at 71.933,30.201 h1.52 r180
  text "CS" at 68.148,15.697 h1.27 r90
  text "CLK" at 62.992,15.037 h1.27 r90
  text "MISO" at 60.274,14.605 h1.2 r90
  text "MOSI" at 65.38,14.503 h1.27 r90
  text "RED" at 32.029,11.76 h1.52
  text "GREEN" at 21.311,11.633 h1.52
  text "BLUE" at 14.148,11.582 h1.52
  text "SWDIO" at 56.007,6.147 h1.52 r270
  text "SWCL" at 53.645,6.096 h1.52 r270
  text "+3.3V" at 74,6.096 h1.52 r270
  text "GND" at 58.572,6.02 h1.52 r270
  text "GND" at 72.161,6.02 h1.52 r270
  text "+3.3V" at 61.189,5.994 h1.52 r270
  text "SDA" at 70.256,5.918 h1.52 r270
  text "LCK" at 68.301,5.817 h1.52 r270
  text "GND" at 14.63,5.08 h1.52 r270
  text "+V" at 20.472,4.978 h1.52 r270
  text "GND" at 23.241,4.953 h1.52 r270
  text "GND" at 31.928,4.953 h1.52 r270
  text "+V" at 12.141,4.902 h1.52 r270
  text "+V" at 29.337,4.851 h1.52 r270
  text "RESET" at 38.608,4.47 h1.52

## Text inside footprints (layer, text, board x,y; h text height)
L1: Mechanical 13 "*" at 28.6,41.116 h1.27 r270
L2: Mechanical 13 "*" at 43.921,31.14 h1.27
L3: Mechanical 13 "*" at 10.16,14.027 h1.27 r90